# Altium PCB hand.PcbDoc
Units mm, origin at the board's own origin, x right, y up, seen from the top; angles counter-clockwise.
Board outline 89.99 x 40.68 mm, 2 copper layers (Top Layer, Bottom Layer); 40 components, 33 nets, 149 pads, 64 vias.
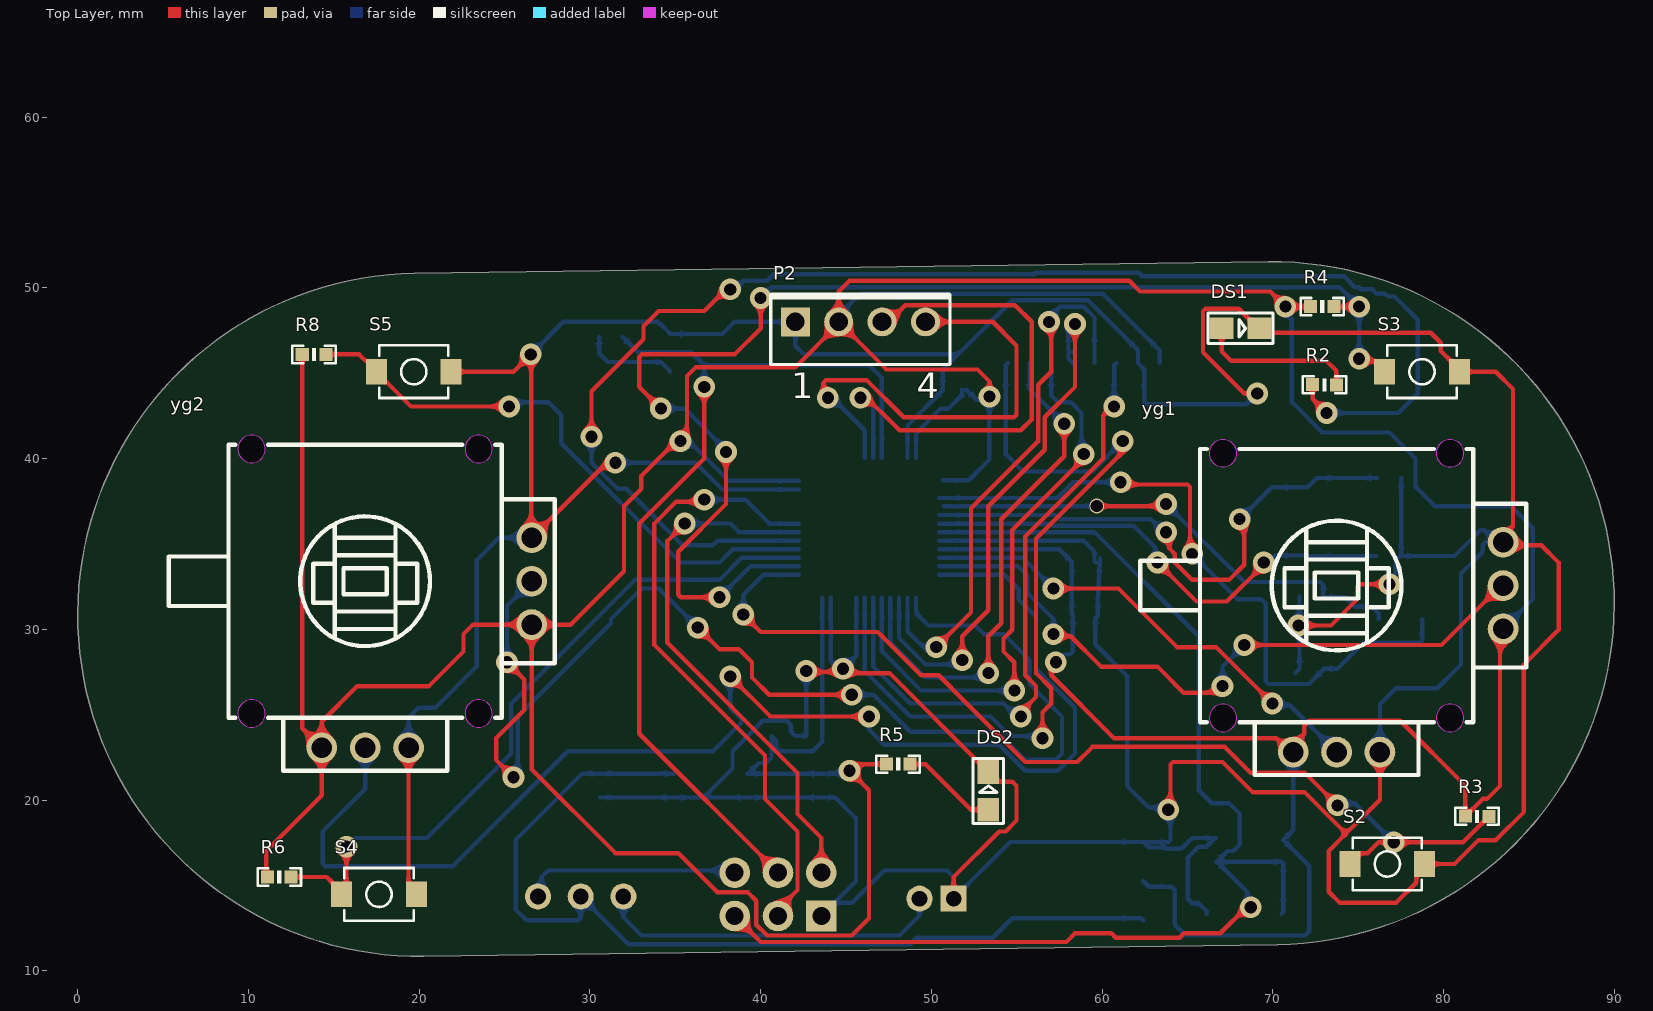
[diagram p0: Top Layer view]
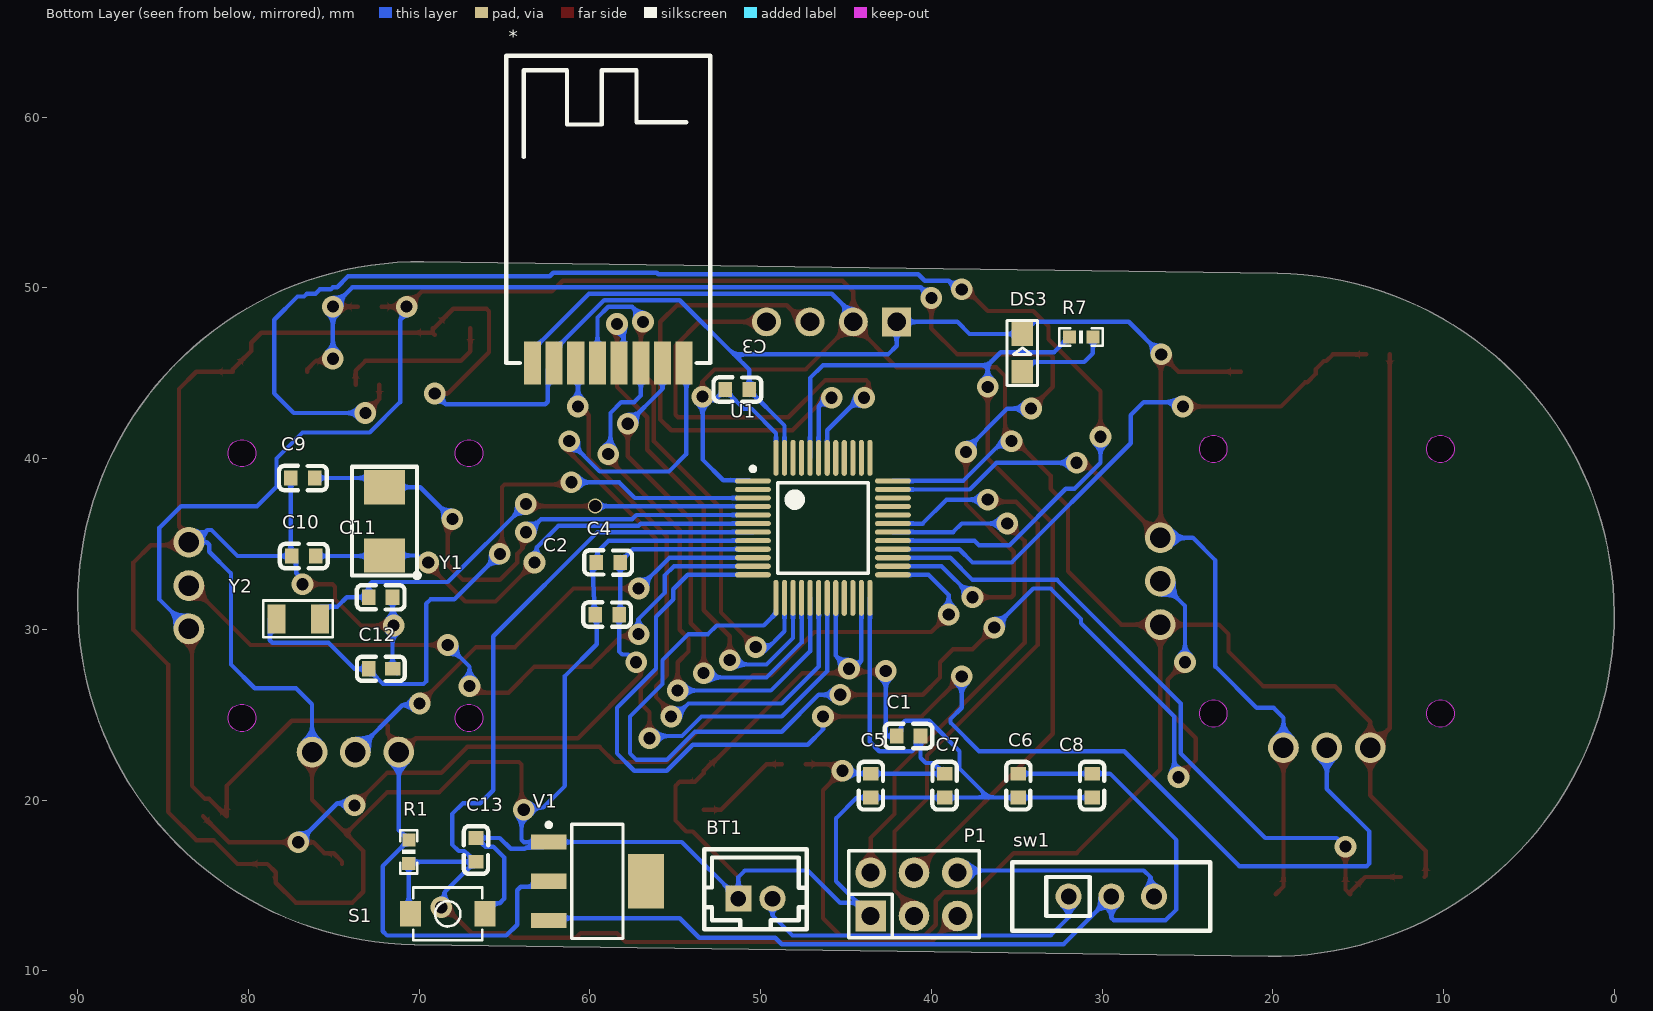
[diagram p1: Bottom Layer view, seen from below]

## Layer stack, top to bottom
Top Solder: solder mask 0.0102, Solder Resist, Dk 3.5
Top Layer: signal copper 0.0356
Dielectric 1: dielectric 0.32, FR-4, Dk 4.8
Bottom Layer: signal copper 0.0356
Bottom Solder: solder mask 0.0102, Solder Resist, Dk 3.5

## Board outline
20.28,10.844 cw(c20.006,30.842) 19.732,50.84 69.728,51.525 cw(c70.002,31.527) 70.276,11.529

## Design rules (kind name [scope] priority, off if disabled: settings)
Clearance [All] p1: gap=12 ignorepadtopadclearanceinfootprint=TRUE
MinimumSolderMaskSliver [All] p1: minsoldermaskwidth=0.054
NetAntennae [All] p1: netantennaetolerance=1
PolygonConnect [All] p1: connectstyle=Relief reliefconductorwidth=0.254 reliefentries=4 polygonreliefangle="90 Angle" airgapwidth=0.254
RoutingVias [All] p1: holewidth=0.711 width=1.27 viastyle="Through Hole" minholewidth=0.711 minwidth=1.27 maxholewidth=0.711 maxwidth=1.27
SilkToSilkClearance [All] p1: silktosilkclearance=1
SilkToSolderMaskClearance [IsPad] p1: minsilkscreentomaskgap=1 clearancetoexposedcopper=TRUE
SolderMaskExpansion [All] p1: expansion=0.102
UnRoutedNet [All] p1: checkbadconnections=TRUE
Width [All] p1: maxlimit=0.254 minlimit=0.254 preferedwidth=0.254
25 further rules are at their usual default settings.

## Components (designator, comment, footprint, x,y, rotation, side; value= is the part's Value field where it differs from the comment)
* "Si24R1" WIRELM-SMD_DL-SI24R1-A 58.928,45.593 r180 bottom
BT1 "Battery" CONN-TH_2P-P2.00_HDGC_HDGC2001WV-2P 50.309,14.224 r180 bottom
C1 "100nF" C0603#1 41.337,23.749 r180 bottom
C2 "100nF" C0603#1 58.99,30.861 r180 bottom
C3 "100nF" C0603#1 51.37,44.044 r0 bottom
C4 "100nF" C0603#1 58.928,33.909 r180 bottom
C5 "10uF" C0603#1 43.546,20.846 r90 bottom
C6 "100nF" C0603#1 34.91,20.846 r90 bottom
C7 "100nF" C0603#1 39.228,20.846 r90 bottom
C8 "10uF" C0603#1 30.592,20.846 r90 bottom
C9 "20pF" C0603#1 76.82,38.862 r0 bottom
C10 "20pF" C0603#1 76.77,34.29 r0 bottom
C11 "15pF" C0603#1 72.263,31.877 r0 bottom
C12 "15pF" C0603#2 72.258,27.686 r0 bottom
C13 "100nF" C0603#1 66.675,17.08 r90 bottom
DS1 "LED2" SMDLED 67.004,47.627 r0 top
DS2 "LED1" SMDLED 53.34,19.431 r90 top
DS3 "LED2" SMDLED 34.674,45.085 r90 bottom
P1 "Header 6" HDR-TH_6P-P2.54-V-M-R2-C3-S2.54-1 41.021,14.478 r180 bottom
P2 "OLED" P04A 45.847,48.006 r0 top
R1 "10K" 0603P 70.612,16.967 r270 bottom
R2 "10K" 0603P 73.025,44.323 r0 top
R3 "10K" 0603P 81.966,19.05 r0 top
R4 "10K" 0603P 72.898,48.895 r0 top
R5 "10K" 0603P 48.057,22.098 r0 top
R6 "10K" 0603P 11.811,15.494 r0 top
R7 "10K" 0603P 31.242,47.117 r180 bottom
R8 "10K" 0603P 13.843,46.101 r0 top
S1 "SW-PB" KEY-SMD_L3.9-W3.0-LS5.0 68.326,13.335 r180 bottom
S2 "SW-PB" KEY-SMD_L3.9-W3.0-LS5.0 76.708,16.256 r0 top
S3 "SW-PB" KEY-SMD_L3.9-W3.0-LS5.0 78.74,45.085 r0 top
S4 "SW-PB" KEY-SMD_L3.9-W3.0-LS5.0 17.653,14.478 r0 top
S5 "SW-PB" KEY-SMD_L3.9-W3.0-LS5.0 19.685,45.085 r0 top
sw1 "EG1218" SW-TH_EG1218 29.464,14.351 r180 bottom
U1 "STM32F103C" LQFP-48_M 46.355,35.941 r180 bottom
V1 "AMS1117-3V3" SOT223_L 59.563,15.24 r180 bottom
Y1 "8M" XTAL(5032) 72.034,36.322 r90 bottom
Y2 "32K768" CRYSTAL-SMD_L3.2-W1.5-1 77.094,30.607 r180 bottom
yg1 "3D161" SW-TH_3D161 77.343,28.956 r0 top
yg2 "3D161" SW-TH_3D161 20.447,29.21 r0 top

## Footprints (in the part's own frame and the unit in brackets; to place one, negate y for a bottom-side part, rotate by r counter-clockwise, add the part's x,y. Pads: shape width x height; smd on the part's side, far side on the other; paste and mask are expansions set on the pad)
0603P [mil]
  rect 30x30 smd: 1(-27,0) 2(27.5,-0.06)
  silkscreen extent -50,-20 50,20
C0603#1 [mm]
  rect 0.8x0.9 smd mask+0.051: 1(-0.7,0) 2(0.7,0)
  silkscreen extent -1.41,-0.71 1.39,0.72
C0603#2 [mm]
  rect 0.9x0.8 smd mask+0.051: 1(-0.7,0)
  rect 0.8x0.9 smd mask+0.051: 2(0.7,0)
  silkscreen extent -1.41,-0.71 1.39,0.72
CONN-TH_2P-P2.00_HDGC_HDGC2001WV-2P [mil]
  rect 60x60 hole 36 mask+1.97: 1(-39.37,0)
  round 60 hole 36 mask+1.97: 2(39.37,0)
  silkscreen extent -118,-71 118,114
CRYSTAL-SMD_L3.2-W1.5-1 [mm]
  rect 1.049x1.699 smd mask+0.051: 1(-1.275,0) 2(1.275,0)
  silkscreen extent -2.03,-1.08 2.03,1.08
HDR-TH_6P-P2.54-V-M-R2-C3-S2.54-1 [mm]
  rect 1.8x1.8 hole 1.05 mask+0.051: 1(-2.54,-1.27)
  round 1.8 hole 1.05 mask+0.051: 2(-2.54,1.27) 3(0,-1.27) 4(0,1.27) 5(2.54,-1.27) 6(2.54,1.27)
  silkscreen extent -3.81,-2.54 3.81,2.54
KEY-SMD_L3.9-W3.0-LS5.0 [mil]
  rect 48.4x59.1 smd mask+2: 1(-86,0) 2(86,0)
  silkscreen extent -80,-61 80,61
LQFP-48_M [mm]
  oval 2.1x0.3 smd: 1(-4.1,2.75) 2(-4.1,2.25) 3(-4.1,1.75) 4(-4.1,1.25) 5(-4.1,0.75) 6(-4.1,0.25) 7(-4.1,-0.25) 8(-4.1,-0.75) 9(-4.1,-1.25) 10(-4.1,-1.75) 11(-4.1,-2.25) 12(-4.1,-2.75) 25(4.1,-2.75) 26(4.1,-2.25) 27(4.1,-1.75) 28(4.1,-1.25) 29(4.1,-0.75) 30(4.1,-0.25) 31(4.1,0.25) 32(4.1,0.75) 33(4.1,1.25) 34(4.1,1.75) 35(4.1,2.25) 36(4.1,2.75)
  oval 0.3x2.1 smd: 13(-2.75,-4.1) 14(-2.25,-4.1) 15(-1.75,-4.1) 16(-1.25,-4.1) 17(-0.75,-4.1) 18(-0.25,-4.1) 19(0.25,-4.1) 20(0.75,-4.1) 21(1.25,-4.1) 22(1.75,-4.1) 23(2.25,-4.1) 24(2.75,-4.1) 37(2.75,4.1) 38(2.25,4.1) 39(1.75,4.1) 40(1.25,4.1) 41(0.75,4.1) 42(0.25,4.1) 43(-0.25,4.1) 44(-0.75,4.1) 45(-1.25,4.1) 46(-1.75,4.1) 47(-2.25,4.1) 48(-2.75,4.1)
  silkscreen extent -4.23,-2.65 2.65,3.57, body extent -3.5,-3.5 3.5,3.5, height 1.6
P04A [mm] "TO, Thru-Hole, Vertical, Heatsink Mounted; 4 In-Line Leads; Pitch 2.54 mm"
  rect 1.7x1.7 hole 1.1: 1(-3.81,0)
  round 1.7 hole 1.1: 2(-1.27,0) 3(1.27,0) 4(3.81,0)
  silkscreen extent -5.25,-2.5 5.25,1.71
SMDLED [mm]
  rect 1.4x1.27 smd: 1(0.001,-0.002) 2(2.211,-0.002)
  silkscreen extent -0.8,-0.89 3.01,0.89
SOT223_L [mm] "SOT223, 4-Leads, Body 6.5x3.5mm, Pitch 2.3mm, Lead Span 7mm, IPC High Density"
  rect 2.1x0.9 smd: 1(-2.85,2.3) 2(-2.85,0) 3(-2.85,-2.3)
  rect 2.1x3.2 smd: 4(2.85,0)
  silkscreen extent -2.98,-3.35 1.5,3.42, body extent -1.85,-3.35 1.85,3.35, height 1.7
SW-TH_3D161 [mm]
  round 1.8 hole 1.2 mask+0.051: 1(6.146,6.146) 2(6.146,3.606) 3(6.146,1.066) (1)(-1.066,-6.146) (2)(-3.606,-6.146) (3)(-6.146,-6.146)
  Keep-Out Layer board cut-out: 3.844,11.355 3.844,11.46 3.79,11.664 3.684,11.846 3.535,11.995 3.353,12.101 3.15,12.155 2.939,12.155 2.735,12.101 2.553,11.995 2.404,11.846 2.299,11.664 2.244,11.46 2.244,11.355 2.244,11.25 2.299,11.046 2.404,10.864 2.553,10.715 2.735,10.61 2.939,10.555 3.15,10.555 3.353,10.61 3.535,10.715 3.684,10.864 3.79,11.046 3.844,11.25 3.844,11.355 3.844,11.355
  Keep-Out Layer board cut-out: 3.844,-4.144 3.844,-4.039 3.79,-3.835 3.684,-3.653 3.535,-3.504 3.353,-3.399 3.15,-3.344 2.939,-3.344 2.735,-3.399 2.553,-3.504 2.404,-3.653 2.299,-3.835 2.244,-4.039 2.244,-4.144 2.244,-4.249 2.299,-4.453 2.404,-4.635 2.553,-4.784 2.735,-4.889 2.939,-4.944 3.15,-4.944 3.353,-4.889 3.535,-4.784 3.684,-4.635 3.79,-4.453 3.844,-4.249 3.844,-4.144 3.844,-4.144
  Keep-Out Layer board cut-out: -9.455,11.355 -9.455,11.46 -9.51,11.664 -9.615,11.846 -9.764,11.995 -9.946,12.101 -10.15,12.155 -10.361,12.155 -10.564,12.101 -10.746,11.995 -10.895,11.846 -11.001,11.664 -11.055,11.46 -11.055,11.355 -11.055,11.25 -11.001,11.046 -10.895,10.864 -10.746,10.715 -10.564,10.61 -10.361,10.555 -10.15,10.555 -9.946,10.61 -9.764,10.715 -9.615,10.864 -9.51,11.046 -9.455,11.25 -9.455,11.355 -9.455,11.355
  Keep-Out Layer board cut-out: -9.455,-4.144 -9.455,-4.039 -9.51,-3.835 -9.615,-3.653 -9.764,-3.504 -9.946,-3.399 -10.15,-3.344 -10.361,-3.344 -10.564,-3.399 -10.746,-3.504 -10.895,-3.653 -11.001,-3.835 -11.055,-4.039 -11.055,-4.144 -11.055,-4.249 -11.001,-4.453 -10.895,-4.635 -10.746,-4.784 -10.564,-4.889 -10.361,-4.944 -10.15,-4.944 -9.946,-4.889 -9.764,-4.784 -9.615,-4.635 -9.51,-4.453 -9.455,-4.249 -9.455,-4.144 -9.455,-4.144
  silkscreen extent -15.11,-7.49 7.49,11.61
SW-TH_EG1218 [mil]
  round 60 hole 36 mask+2: 1(-98.42,0) 2(0,0) 3(98.43,0)
  silkscreen extent -228,-79 228,79
WIRELM-SMD_DL-SI24R1-A [mm]
  rect 1x2.5 smd mask+0.05: 1(-4.445,0) 2(-3.175,0) 3(-1.905,0) 4(-0.635,0) 5(0.635,0) 6(1.905,0) 7(3.175,0) 8(4.445,0)
  silkscreen extent -5.97,0 5.97,18
XTAL(5032) [mm]
  rect 2x2.4 smd: 1(-2,0) 2(2,0)
  silkscreen extent -3.32,-2.06 3.21,1.91

## Part data
BT1: "采用ph2.0接线端子", LatestRevisionDate=17-Jul-2002, LatestRevisionNote="Re-released for DXP Platform.", PackageDescription="Battery; 2 Leads", PackageReference=BAT-2, Published=24-Mar-1999, Publisher="Altium Limited"
C1 C2 C3 C4 C5 C6 C7 C8 C9 C10 C11 C12 C13: library part Cap, "Capacitor", LatestRevisionDate=17-Jul-2002, LatestRevisionNote="Re-released for DXP Platform.", PackageDescription="Radial Cap, Thru-Hole; 2 Leads; 0.3 in Pin Spacing", PackageReference=RAD-0.3, Published=8-Jun-2000, Publisher="Altium Limited"
DS1 DS3: "Typical RED, GREEN, YELLOW, AMBER GaAs LED"
DS2: library part LED2, "Typical RED, GREEN, YELLOW, AMBER GaAs LED"
P1: "Header, 6-Pin", LatestRevisionDate=17-Jul-2002, LatestRevisionNote="Re-released for DXP Platform.", Publisher="Altium Limited"
P2: BOM_Manufacturer=BOOMELE(²©Ä, BOM_Manufacturer Part=2.54-1*4Pĸ, BOM_Supplier=LCSC, BOM_Supplier Part=C2718488, Contributor=PQG2030PQG, image=http://image.lceda.cn/szlcsc/C57369.jpg, spicePre=P, spiceSymbolName="R-HEADE 4P"
R1 R2 R3 R4 R5 R6 R7 R8: library part R
S1 S2 S3 S4 S5: "Switch", LatestRevisionDate=17-Jul-2002, LatestRevisionNote="Re-released for DXP Platform.", PackageDescription="Switch; 2 Leads", PackageReference=SPST-2, Published=24-Mar-1999, Publisher="Altium Limited"
U1: "STM32单片机48引脚"
V1: library part AMS1117, "三端稳压芯片", 学习资源=www.o
Y1 Y2: library part XTAL, "Crystal Oscillator", LatestRevisionDate=17-Jul-2002, LatestRevisionNote="Re-released for DXP Platform.", PackageDescription="Crystal, Thru-Hole; 2 Leads; Body 3.1 x 8.2 mm (Dia.xH)", PackageReference=R38, Published=8-Jun-2000, Publisher="Altium Limited"

## Via types
v1: diameter 1.27, hole 0.711, Top Layer to Bottom Layer, 63 vias
v2: diameter 0.87, hole 0.711, Top Layer to Bottom Layer, 1 vias

## Nets (pads, with @x,y where several pads share a name; then routed paths per layer and width w, separated by ;. In a path a pad name is that pad's centre, name@x,y a point inside that pad or via, vN(x,y) a via of type N, cw(c..) or ccw(c..) an arc to the next point about the centre after c; other vN are vias at no path point)
3V3: *.1 C1.2 C2.2 C3.2 C4.2 C5.2 C7.2 P2.2 R1.1 R3.1 R4.1 R5.1 R6.1 R8.1 U1.1 U1.9 U1.24 U1.36 U1.48 V1.2 yg1.3 yg1.(3) yg2.3 yg2.(3) | length 343.2
  Top Layer w0.254: R6.1 11.049,15.57 11.049,17.018 14.301,20.27 14.301,23.064 ; R8.1 13.157,24.209 14.301,23.064 ; v1@35.179,41.148 33.02,38.989 33.02,38.227 32.004,37.211 32.004,33.401 28.879,30.276 yg2.3 ; v1(35.306,41.021) 35.687,41.402 35.687,44.831 36.195,45.339 42.037,45.339 44.514,47.816 P2.2@44.767,47.816 ; R5.1 45.593,22.098 v1(45.212,21.717) 46.355,20.574 46.355,13.081 45.339,12.065 40.386,12.065 39.751,12.7 39.751,14.097 39.243,14.605 37.465,14.605 35.179,16.891 31.496,16.891 26.593,21.794 yg2.3 ; v1(53.404,43.624) 53.404,44.514 52.705,45.212 47.371,45.212 P2.2@44.767,47.816 ; v1@57.023,28.067 57.023,27.305 60.706,23.622 70.197,23.622 71.009,22.81 71.197,22.81 71.197,23.229 71.852,23.884 71.852,24.354 72.136,24.638 77.47,24.638 81.28,20.828 R3.1 82.296,20.066 82.55,20.066 83.312,20.828 83.312,29.845 yg1.3 ; R4.1 v1(70.739,48.895) 69.85,49.784 62.23,49.784 61.595,50.419 45.212,50.419 44.577,49.784 P2.2 P2.2@44.767,47.816 ; 14.301,23.064 14.301,24.588 16.383,26.67 20.574,26.67 22.606,28.702 22.606,29.718 23.164,30.276 yg2.3
  Bottom Layer w0.254: v1@35.433,41.021 35.814,41.021 38.144,38.691 U1.36 ; C7.2 C7.2@39.277,21.546 ; U1.24 43.605,23.412 43.053,22.86 41.148,22.86 40.91,23.098 40.91,23.476 C1.2 40.637,22.476 40.333,22.172 39.904,22.172 C7.2@39.277,21.546 ; P2.2 44.577,48.397 45.223,49.044 45.837,49.657 60.059,49.657 63.373,46.343 *.1 ; v1(45.212,21.717) v1@45.168,21.546 ; v1@45.339,21.717 v1@45.168,21.546 ; U1.48 49.105,41.485 50.546,42.926 51.002,42.926 51.816,43.74 C3.2@51.816,44.044 ; U1.9 57.496,34.691 58.228,33.959 C4.2 58.228,30.923 C2.2 58.293,30.858 58.293,28.702 58.113,28.522 57.753,28.522 v1(57.298,28.067) ; U1.1@50.673,38.735 52.197,38.735 53.404,39.941 v1(53.404,43.624) 53.213,43.434 52.68,43.434 52.393,43.721 52.343,43.721 52.07,43.994 C3.2 ; V1.2 62.736,14.917 64.055,14.917 64.262,14.71 64.262,12.7 64.897,12.065 71.882,12.065 72.136,12.319 72.136,16.129 R1.1 71.197,18.238 71.197,22.81 ; v1@70.485,48.768 71.12,48.133 71.12,43.307 72.898,41.529 76.835,41.529 78.359,40.005 78.359,38.354 79.502,37.211 83.947,37.211 85.217,35.941 85.217,31.75 yg1.3 ; C7.2@39.277,21.546 C5.2 v1@45.168,21.546
adc1: U1.10 yg1.(2) | length 28
  Top Layer w0.254: v1(57.15,32.385) 60.96,32.385 64.389,28.956 66.675,28.956 v1(69.977,25.654)
  Bottom Layer w0.254: U1.10 55.344,34.191 v1(57.15,32.385) ; v1(69.977,25.654) 70.076,25.555 70.993,25.555 73.737,22.81
adc2: U1.11 yg1.2 | length 40.5
  Top Layer w0.254: v1(57.15,29.718) 57.277,29.591 58.166,29.591 59.944,27.813 63.246,27.813 64.77,26.289 66.675,26.289 v1(67.056,26.67) ; v1(68.326,29.083) 79.883,29.083 83.362,32.562 yg1.2
  Bottom Layer w0.254: U1.11 55.082,33.691 55.626,33.147 55.626,32.131 57.15,30.607 v1(57.15,29.718) ; v1(67.056,26.67) 67.056,27.813 v1(68.326,29.083)
adc3: U1.12 yg2.(2) | length 78.3
  Top Layer w0.254: v1@38.227,27.305 v1(38.227,27.241) 40.576,24.892 v1(46.355,24.892)
  Bottom Layer w0.254: 16.841,23.064 16.841,20.651 14.351,18.161 14.351,16.278 14.5,16.129 21.971,16.129 28.702,22.86 37.211,22.86 38.884,24.533 38.884,24.743 38.227,25.4 v1(38.227,27.241) ; v1(46.355,24.892) 46.355,24.13 47.244,23.241 53.975,23.241 55.499,21.717 57.404,21.717 58.42,22.733 58.42,25.4 56.134,27.686 56.134,30.734 55.118,31.75 55.118,32.346 54.273,33.191 U1.12
adc4: U1.13 yg2.2 | length 71.1
  Top Layer w0.254: v1@25.4,27.813 26.162,27.051 26.162,25.273 24.511,23.622 24.511,22.352 v1(25.527,21.336) ; v1(36.322,30.099) 37.592,28.829 38.735,28.829 39.497,28.067 39.497,27.178 40.513,26.162 v1(45.339,26.162)
  Bottom Layer w0.254: v1(25.146,28.067) 25.146,31.369 yg2.2 ; v1@25.781,21.717 25.781,24.892 31.242,30.353 31.242,30.607 33.02,32.385 34.036,32.385 v1(36.322,30.099) ; v1@45.593,26.162 46.609,26.162 48.768,24.003 53.848,24.003 55.499,22.352 57.277,22.352 57.658,22.733 57.658,24.892 55.753,26.797 55.753,28.194 54.229,29.718 53.086,29.718 52.578,30.226 49.82,30.226 49.105,30.941 U1.13
Boot0: P1.4 R7.1 U1.44 | length 55.5
  Top Layer w0.254: v1(36.703,44.196) 36.703,40.005 32.893,36.195 32.893,23.876 P1.4
  Bottom Layer w0.254: R7.1 32.817,46.228 35.941,46.228 36.703,45.466 ; v1(36.703,44.196) 36.703,45.466 ; U1.44 47.105,44.716 46.355,45.466 36.703,45.466
ce: *.3 U1.18 | length 37.3
  Top Layer w0.254: v1(55.245,24.892) 55.245,25.146 56.134,26.035 56.134,26.67 55.499,27.305 55.499,35.433 60.071,40.005 60.071,42.545 v1@60.833,43.307
  Bottom Layer w0.254: U1.18 46.605,27.817 48.768,25.654 54.229,25.654 v1@54.864,25.019 ; v1(60.706,43.053) 60.706,45.466 *.3
csn: *.4 U1.14 | length 32
  Top Layer w0.254: v1(50.292,28.956) 52.324,30.988 52.324,37.084 56.261,41.021 56.261,44.323 57.023,45.085 v1@57.023,47.879
  Bottom Layer w0.254: U1.14 48.605,29.881 49.784,28.702 v1@50.292,28.702 ; v1(56.896,48.006) 56.896,48.26 57.531,48.895 58.928,48.895 59.563,48.26 *.4
GND: *.2 BT1.1 C1.1 C2.1 C3.1 C4.1 C5.1 C6.1 C7.1 C8.1 C9.2 C10.2 C11.1 C12.1 C13.2 DS1.2 DS2.2 DS3.2 P1.1 P2.1 S1.2 S2.2 S3.2 S4.2 S5.2 U1.8 U1.20 U1.23 U1.35 U1.47 V1.1 yg1.1 yg1.(1) yg2.1 yg2.(1) | length 387
  Top Layer w0.254: 19.381,23.064 19.381,14.934 S4.2 ; S5.2 25.527,45.085 v1(26.543,46.101) 26.568,46.076 26.568,35.38 yg2.1 30.988,39.751 v1(31.496,39.751) v1@31.877,39.751 ; v1(42.672,27.559) 42.735,27.495 v1@44.895,27.495 ; v1@44.831,27.432 47.551,27.432 52.769,22.215 52.834,22.215 53.342,21.707 DS2.2 53.342,21.577 53.85,21.069 54.75,21.069 54.991,20.828 54.991,18.796 54.356,18.161 53.975,18.161 51.309,15.495 BT1.1 ; v1(63.881,19.431) 64.008,19.558 64.008,22.076 64.157,22.225 67.056,22.225 68.834,20.447 71.882,20.447 74.295,18.034 ; v1(69.088,43.815) 68.326,43.815 65.913,46.228 65.913,48.619 66.062,48.768 68.007,48.768 69.15,47.625 DS1.2 DS1.2@69.215,47.371 ; DS1.2@69.088,47.244 DS1.2@69.215,47.371 ; v1(71.501,30.226) 73.406,30.226 74.93,31.75 74.93,32.49 75.079,32.639 v1@76.454,32.639 ; 76.277,22.81 76.277,20.016 74.295,18.034 ; DS1.2@69.215,47.371 79.248,47.371 79.842,46.777 79.842,46.303 80.924,45.221 S3.2 83.058,45.085 84.074,44.069 84.074,36.068 83.566,35.56 84.201,34.925 85.725,34.925 86.741,33.909 86.741,29.972 84.709,27.94 84.709,19.304 83.058,17.653 82.042,17.653 80.645,16.256 S2.2 78.405,15.768 78.405,15.159 77.238,13.992 73.914,13.992 73.279,14.627 73.279,17.018 74.295,18.034
  Bottom Layer w0.254: 19.381,23.064 19.381,24.821 19.961,25.4 20.955,25.4 23.368,27.813 23.368,34.036 24.688,35.356 yg2.1 ; v1(26.543,46.101) 28.448,48.006 33.962,48.006 34.1,47.869 34.165,47.869 34.673,47.361 DS3.2 37.771,47.296 38.481,48.006 P2.1 42.037,46.609 42.545,46.101 51.562,46.101 ; C8.1 C6.1 36.656,20.146 ; v1(31.496,39.751) 36.195,39.751 37.755,38.191 U1.35 ; v1(42.672,27.559) 42.672,23.749 C1.1 41.764,24.022 41.764,24.403 41.529,24.638 40.132,24.638 38.354,22.86 38.354,21.844 36.656,20.146 ; P1.1 P1.1@44.334,13.981 ; U1.23 44.105,28.158 v1@44.704,27.559 ; v1(44.831,27.686) 45.605,28.46 U1.20 ; U1.47 48.605,41.929 50.67,43.994 C3.1 50.67,45.209 51.562,46.101 ; U1.8 58.916,35.191 59.563,34.544 59.563,33.974 C4.1 ; S1.2 66.142,13.471 65.654,13.959 65.289,13.959 65.024,14.224 65.024,16.637 65.659,17.272 66.117,17.272 C13.2@66.625,17.78 ; C13.2 C13.2@66.625,17.78 ; v1(69.088,43.815) 68.453,43.18 62.625,43.18 62.476,43.329 62.476,45.22 *.2 62.103,46.343 59.17,49.276 54.737,49.276 51.562,46.101 ; C12.1@71.304,27.432 C12.1 71.563,27.691 C11.1 C11.1@71.563,31.927 ; 76.277,22.81 76.277,25.604 77.216,26.543 79.629,26.543 81.026,27.94 81.026,33.274 82.296,34.544 82.296,34.953 82.445,35.102 yg1.1@83.102,35.102 ; v1(76.835,32.639) 76.835,32.914 77.197,33.276 77.197,34.017 C10.2 ; C9.2 77.52,34.34 C10.2 ; yg1.1 yg1.1@83.102,35.102 ; 36.656,20.146 C7.1 C5.1 44.37,20.146 45.593,18.923 45.593,15.24 P1.1@44.334,13.981 ; P1.1@44.334,13.981 45.35,13.981 47.244,15.875 50.927,15.875 51.309,15.493 BT1.1 54.625,17.54 V1.1 V1.1@62.427,17.526 ; 59.755,31.623 59.755,30.799 59.606,30.65 59.606,29.123 61.468,27.261 61.468,20.828 62.738,19.558 63.754,19.558 v1(63.881,19.431) 64.008,19.304 64.008,17.675 63.859,17.526 V1.1@62.427,17.526 ; 59.755,31.623 C4.1@59.869,33.897 ; 59.755,31.623 C4.1@59.869,33.897 ; C4.1@59.869,33.897 59.882,34.163 C4.1@59.869,33.897 ; V1.1@62.427,17.526 62.736,17.217 63.747,17.217 63.819,17.145 64.643,17.145 65.278,17.78 C13.2@66.625,17.78 ; C10.2 80.645,34.29 82.169,35.814 82.389,35.814 yg1.1@83.102,35.102
IRQ: *.8 U1.19 | length 49.2
  Top Layer w0.254: v1(56.515,23.622) 56.515,25.146 57.023,25.654 57.023,26.543 56.134,27.432 56.134,35.306 61.214,40.386 v1(61.214,41.021)
  Bottom Layer w0.254: U1.19 46.105,27.555 48.768,24.892 53.467,24.892 54.61,23.749 v1@56.007,23.749 ; *.8 54.356,45.466 54.356,40.259 55.372,39.243 59.436,39.243 v1(61.214,41.021)
k1: R3.2 S2.1 U1.25 | length 58.5
  Top Layer w0.254: v1(38.989,30.861) 40.005,29.845 46.863,29.845 49.403,27.305 50.441,27.305 51.203,26.543 51.192,26.532 55.499,22.225 58.547,22.225 59.436,23.114 67.183,23.114 68.707,21.59 71.882,21.59 v1(73.787,19.685) ; S2.1 74.524,16.392 75.011,16.88 75.554,16.88 76.2,17.526 v1(77.089,17.526) 81.142,17.526 R3.2
  Bottom Layer w0.254: v1(38.989,30.861) 38.989,32.004 40.176,33.191 U1.25 ; v1@74.041,19.812 74.803,19.812 v1(77.089,17.526)
k2: R4.2 S3.1 U1.26 | length 77.6
  Top Layer w0.254: v1(34.163,42.926) 32.893,44.196 32.893,45.952 33.042,46.101 38.481,46.101 40.005,47.625 v1(40.005,49.403) ; v1(37.592,31.877) 35.328,31.877 35.179,32.026 35.179,34.544 37.973,37.338 v1(37.973,40.386) ; R4.2 73.598,48.895 v1(75.057,48.895) ; v1@74.941,45.709 76.068,45.709 76.556,45.221 S3.1
  Bottom Layer w0.254: v1(34.163,42.926) 35.56,42.926 v1@38.1,40.386 ; v1@37.719,32.004 39.406,33.691 U1.26 ; v1(40.005,49.403) 40.64,50.038 73.914,50.038 v1(75.057,48.895) v1(75.057,45.847)
k3: R6.2 S4.1 U1.27 | length 41.6
  Top Layer w0.254: R6.2 14.59,15.492 15.469,14.614 S4.1 15.748,14.757 v1(15.748,17.272)
  Bottom Layer w0.254: v1(15.748,17.272) 16.256,17.78 20.447,17.78 25.4,22.733 25.4,25.654 32.639,32.893 37.592,32.893 38.89,34.191 U1.27
k4: R8.2 S5.1 U1.28 | length 34.2
  Top Layer w0.254: R8.2 16.486,46.099 16.877,45.709 17.013,45.709 17.501,45.221 S5.1 17.501,44.949 17.988,44.461 18.124,44.461 19.533,43.053 v1(25.273,43.053)
  Bottom Layer w0.254: v1@25.4,43.18 25.527,43.307 27.559,43.307 28.321,42.545 28.321,40.894 35.306,33.909 37.592,33.909 38.374,34.691 U1.28
LED: R2.1 U1.29 | length 83.2
  Top Layer w0.254: v1(30.099,41.275) 30.099,43.942 33.147,46.99 33.147,47.752 34.036,48.641 36.703,48.641 37.973,49.911 v1(38.227,49.911) ; R2.1 72.339,43.485 v1(73.152,42.672)
  Bottom Layer w0.254: v1(30.099,41.275) 30.099,39.751 31.623,38.227 32.131,38.227 35.433,34.925 37.211,34.925 37.477,35.191 U1.29 ; v1@38.481,49.911 38.989,50.419 40.386,50.419 40.767,50.8 56.007,50.8 56.092,50.885 62.145,50.885 62.357,50.673 74.168,50.673 74.803,50.038 75.057,50.038 75.184,49.911 75.819,49.911 76.073,49.657 76.581,49.657 76.75,49.488 77.131,49.488 78.486,48.133 78.486,43.815 77.343,42.672 v1(73.152,42.672)
miso: *.7 U1.16 | length 29.9
  Top Layer w0.254: v1(53.34,27.432) 53.34,29.591 54.102,30.353 54.102,36.449 57.785,40.132 v1(57.785,42.037)
  Bottom Layer w0.254: U1.16 47.605,29.23 49.657,27.178 v1@53.213,27.178 ; *.7 55.753,44.069 v1(57.785,42.037)
mosi: *.6 U1.17 | length 34.3
  Top Layer w0.254: v1(54.864,26.416) 54.864,28.067 54.229,28.702 54.229,29.464 54.737,29.972 54.737,35.814 59.055,40.132 v1@59.182,40.132
  Bottom Layer w0.254: U1.17 47.105,28.714 49.403,26.416 v1@54.61,26.416 ; *.6 57.023,43.688 57.404,43.307 58.166,43.307 58.801,42.672 58.801,40.386 v1(58.928,40.259)
NetC9_1: C9.1 U1.5 Y1.2 | length 32.8
  Top Layer w0.254: v1(63.754,35.687) 63.948,35.493 63.948,34.731 64.262,34.417 64.262,33.909 65.278,32.893 67.437,32.893 68.326,33.782 68.326,36.3 68.177,36.449 v1(68.061,36.449) v1@67.945,36.449
  Bottom Layer w0.254: U1.5 57.289,36.691 57.531,36.449 62.865,36.449 v1@63.881,35.433 ; v1(68.061,36.449) 69.934,38.322 Y1.2 72.574,38.862 C9.1
NetC10_1: C10.1 U1.6 Y1.1 | length 28.7
  Top Layer w0.254: v1(63.246,33.909) 65.532,31.623 67.31,31.623 v1@69.342,33.655
  Bottom Layer w0.254: U1.6 57.031,36.191 57.154,36.068 61.849,36.068 63.119,34.798 v1@63.119,34.036 ; v1(69.469,33.909) 69.744,33.909 70.157,34.322 Y1.1 72.066,34.29 C10.1
NetDS1_1: DS1.1 R2.2 | length 9.4
  Top Layer w0.254: DS1.1 67.005,46.279 67.564,45.72 73.152,45.72 73.724,45.148 R2.2
NetDS2_1: DS2.1 R5.2 | length 5.7
  Top Layer w0.254: R5.2 49.659,22.096 52.323,19.432 DS2.1
NetDS3_1: DS3.1 R7.2 | length 5.6
  Bottom Layer w0.254: R7.2 30.543,46.164 31.049,45.659 34.165,45.659 34.673,45.151 DS3.1
NRST: C13.1 P1.5 R1.2 S1.1 U1.7 | length 75.9
  Top Layer w0.254: P1.5 40.005,11.684 57.912,11.684 58.42,12.192 60.547,12.192 60.801,11.938 64.548,11.938 64.802,12.192 66.929,12.192 68.453,13.716 v1(68.707,13.716) v1@68.513,13.91
  Bottom Layer w0.254: U1.7 59.559,35.691 65.659,29.591 65.659,20.574 66.421,19.812 67.437,19.812 68.072,19.177 68.072,17.399 67.685,17.012 67.357,17.012 C13.1@66.725,16.38 ; C13.1 C13.1@66.725,16.38 ; v1(68.707,13.716) 68.513,13.91 68.513,14.592 C13.1@66.725,16.38 ; S1.1 70.614,13.438 R1.2 70.502,16.38 C13.1@66.725,16.38
osc32in: C12.2 U1.3 Y2.1 | length 41.2
  Top Layer w0.254: v1(61.087,38.608) 61.214,38.481 65.002,38.481 65.151,38.332 65.151,34.544 v1(65.278,34.417)
  Bottom Layer w0.254: U1.3 57.376,37.691 58.293,38.608 v1(61.087,38.608) ; v1@65.278,34.798 v1(65.278,34.417) 67.945,31.75 69.342,31.75 69.596,31.496 69.596,26.946 69.745,26.797 72.119,26.797 72.958,27.636 C12.2 73.787,27.686 75.311,29.21 78.601,29.21 78.75,29.359 Y2.1@78.75,30.607
osc32out: C11.2 U1.4 Y2.2 | length 29.7
  Top Layer w0.254: v2(59.69,37.211) 63.627,37.211 v1(63.754,37.338)
  Bottom Layer w0.254: U1.4@50.729,37.211 v2(59.69,37.211) 58.928,37.211 ; v1(63.754,37.338) 68.326,32.766 72.771,32.766 72.963,32.574 C11.2 74.246,31.877 74.793,31.33 75.802,31.33 76.2,30.932 Y2.2@76.2,30.607
RX: P1.3 U1.31 | length 36.6
  Top Layer w0.254: v1@36.638,37.719 36.384,37.465 35.052,37.465 33.782,36.195 33.782,29.083 40.259,22.606 40.259,20.066 42.164,18.161 42.164,14.732 41.021,13.589 P1.3
  Bottom Layer w0.254: v1(36.703,37.592) 39.116,37.592 40.517,36.191 U1.31
sck: *.5 U1.15 | length 32
  Top Layer w0.254: v1(51.816,28.194) 51.816,29.591 53.34,31.115 53.34,37.211 56.642,40.513 56.642,42.418 58.42,44.196 v1(58.42,47.879)
  Bottom Layer w0.254: U1.15 48.105,29.492 49.657,27.94 51.562,27.94 v1(51.816,28.194) ; *.5 58.039,45.847 58.039,47.371 58.42,47.752 v1(58.42,47.879) ; *.5@58.293,46.228 *.5@58.42,46.101
scl: P2.4 U1.42 | length 28.3
  Top Layer w0.254: v1@43.688,43.434 43.688,44.45 43.815,44.577 46.228,44.577 48.387,42.418 54.842,42.418 54.991,42.567 54.991,46.609 53.594,48.006 P2.4
  Bottom Layer w0.254: v1@43.688,43.688 44.323,43.688 44.345,43.71 44.345,43.412 46.105,41.652 U1.42
  other v1: 43.942,43.561
sda: P2.3 U1.43 | length 30.3
  Top Layer w0.254: v1@45.974,43.815 48.133,41.656 55.245,41.656 55.88,42.291 55.88,48.006 54.903,48.983 48.475,48.983 47.498,48.006 P2.3
  Bottom Layer w0.254: v1@45.974,43.688 46.605,43.057 U1.43
  other v1: 45.847,43.561
TX: P1.2 U1.30 | length 31.5
  Top Layer w0.254: v1(35.56,36.195) 34.544,35.179 34.544,29.21 42.164,21.59 42.164,19.177 43.561,17.78 P1.2
  Bottom Layer w0.254: v1(35.56,36.195) 38.227,36.195 38.731,35.691 U1.30
Vbattary: BT1.2 sw1.1 | length 20.5
  Bottom Layer w0.254: sw1.1 31.964,13.121 33.02,12.065 48.133,12.065 49.309,13.241 BT1.2
Vdownload: P1.6 sw1.3 | length 12.7
  Bottom Layer w0.254: sw1.3 27.178,14.565 27.178,15.494 27.559,15.875 38.354,15.875 P1.6
Vsystem: C6.2 C8.2 sw1.2 V1.3 | length 55.1
  Bottom Layer w0.254: C6.2 C8.2 29.547,21.546 25.654,17.653 25.654,13.589 26.289,12.954 29.315,12.954 29.464,13.103 sw1.2 32.258,11.557 48.768,11.557 49.149,11.938 53.594,11.938 54.737,13.081 62.272,13.081 V1.3
pads on no net: U1.2 U1.21 U1.22 U1.32 U1.33 U1.34 U1.37 U1.38 U1.39 U1.40 U1.41 U1.45 U1.46 V1.4

## Silkscreen, mask and mechanical layers (free items; w line width, h text height)
Mechanical 1:
  the board outline again, w0.013

## Text inside footprints (layer, text, board x,y; h text height)
P2: Top Overlay "1" at 41.787,43.531 h1.5; Top Overlay "4" at 49.157,43.531 h1.5